# Altium PCB SKAR_chwytakfile.PcbDoc
Units mil, origin at the board's own origin, x right, y up, seen from the top; angles counter-clockwise.
Board outline 6000 x 4000 mil, 2 copper layers (Top Layer, Bottom Layer); 24 components, 27 nets, 127 pads, 20 vias.
Unrouted connection lines stored in the file: 3.
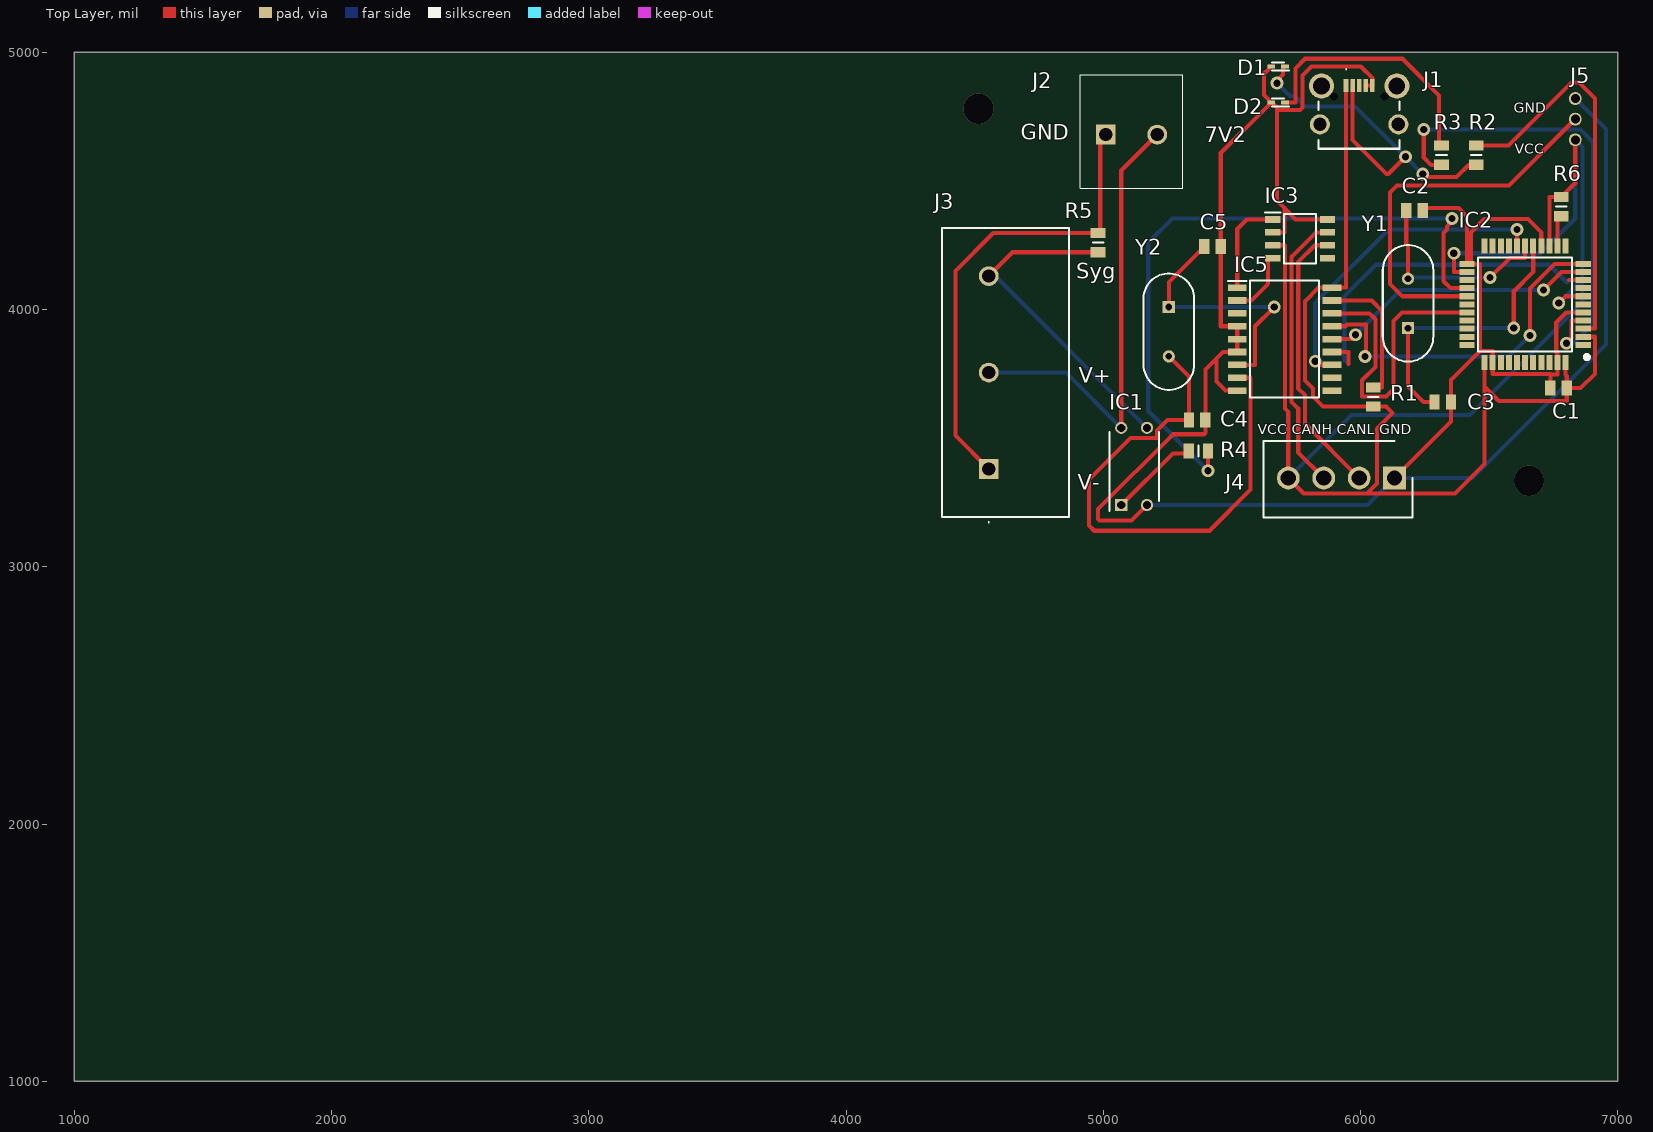
[diagram p0: Top Layer view]
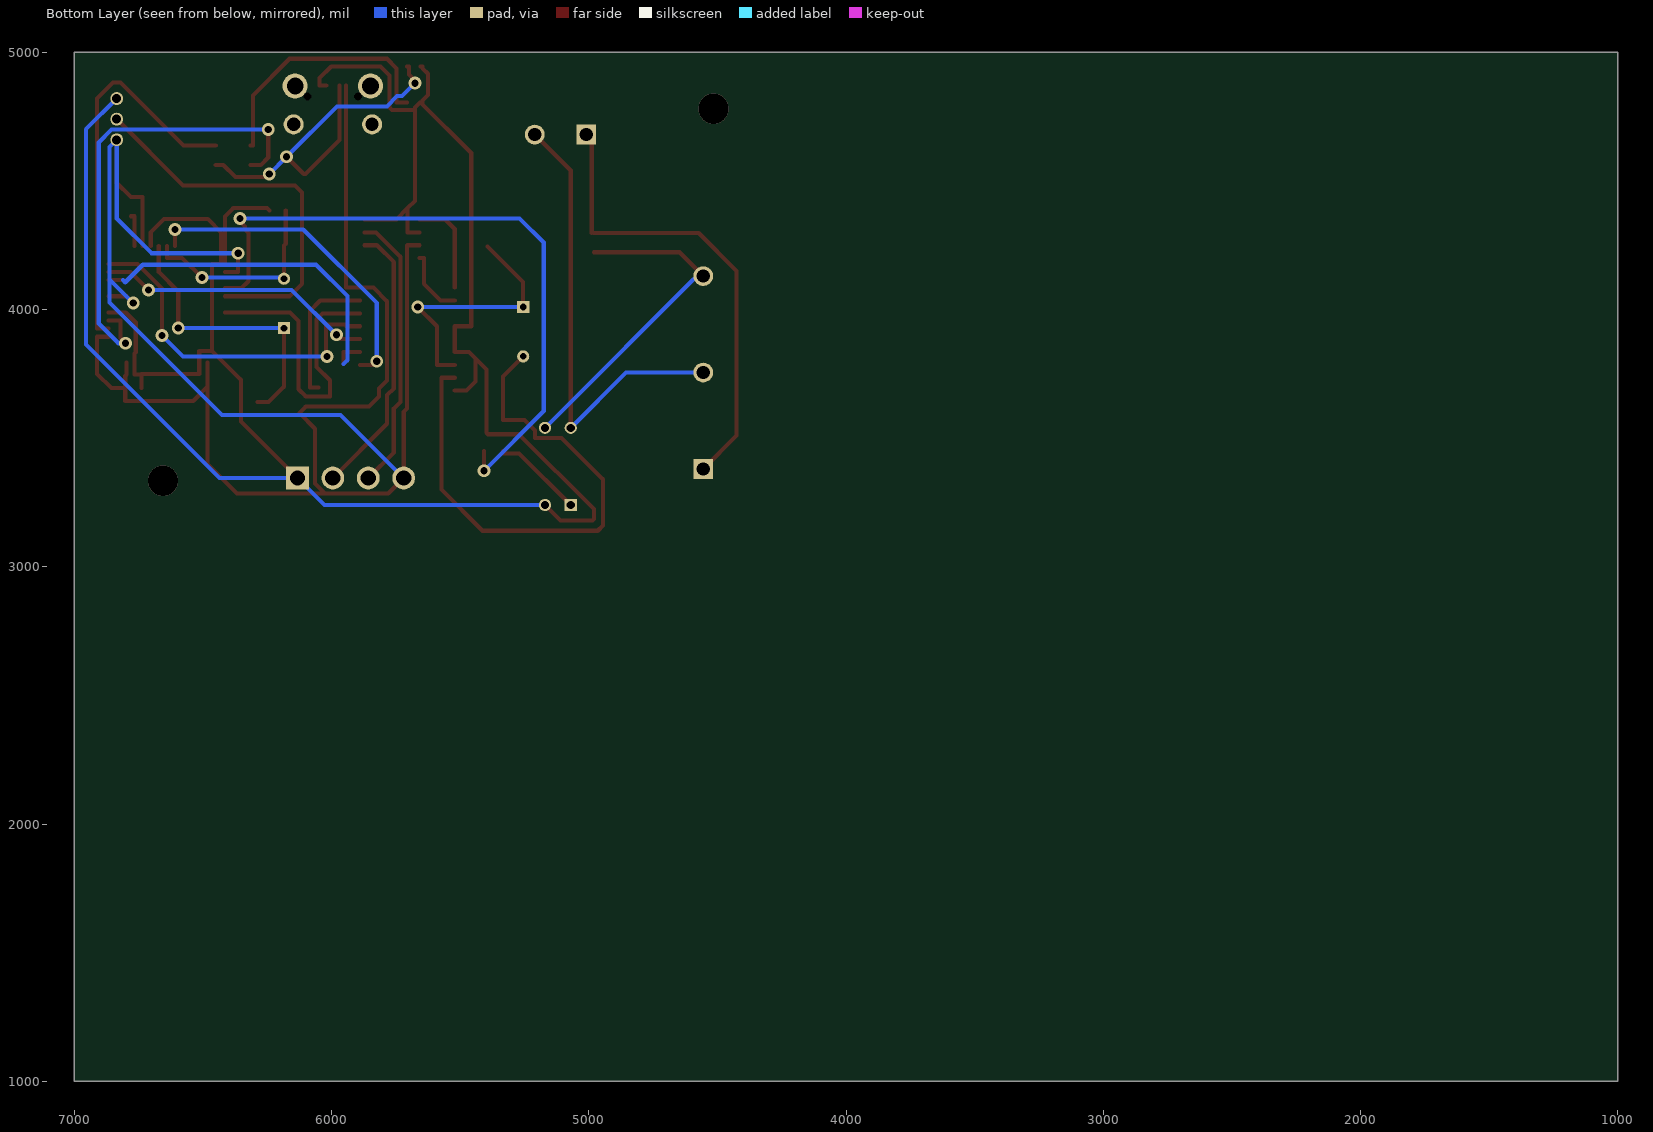
[diagram p1: Bottom Layer view, seen from below]
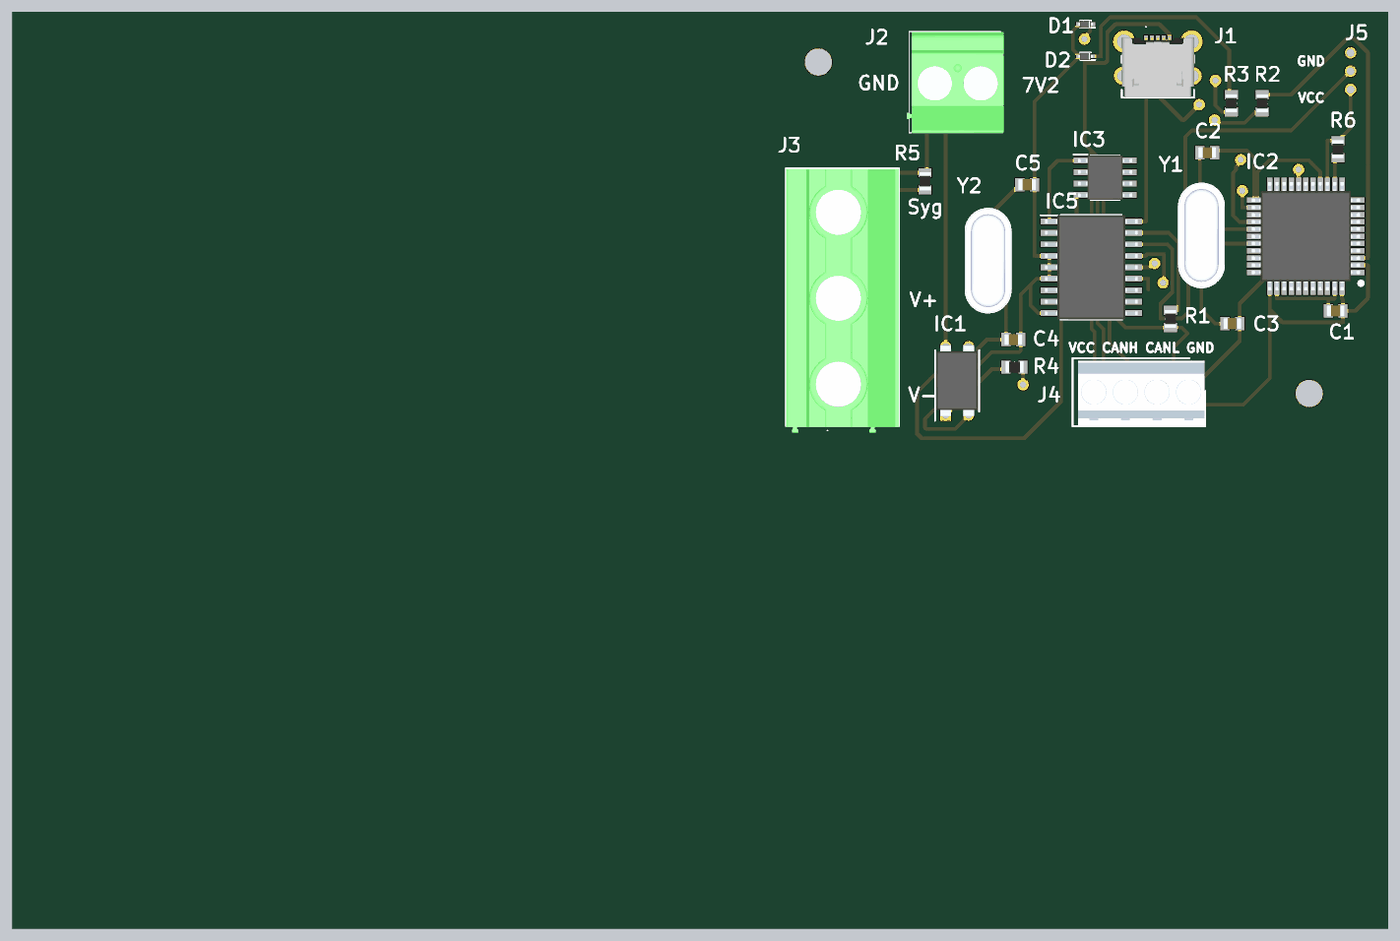
[diagram p2: 3D render of the assembled board from above, using the file's embedded part models]

## Layer stack, top to bottom
Top Solder: solder mask 0.4, Solder Resist, Dk 3.5
Top Layer: signal copper 1.4
Dielectric 1: dielectric 12.6, FR-4, Dk 4.8
Bottom Layer: signal copper 1.4
Bottom Solder: solder mask 0.4, Solder Resist, Dk 3.5

## Board outline
1000,1000 7000,1000 7000,5000 1000,5000

## Design rules (kind name [scope] priority, off if disabled: settings)
Clearance [All] p1: gap=10 ignorepadtopadclearanceinfootprint=TRUE except(16: Arc-Arc Arc-Track Track-Track)
PolygonConnect [All] p1: connectstyle=Relief reliefconductorwidth=10 reliefentries=4 polygonreliefangle="90 Angle" airgapwidth=10
RoomDefinition Sheet1 [InComponentClass('Sheet1')] p1: confinementstyle=ConfineOut formatcopy=TRUE lockcomponents=FALSE outline 7285,2995 14100,2995 14100,4715 7285,4715
RoutingVias [All] p1: holewidth=28 width=50 viastyle="Through Hole" minholewidth=28 minwidth=50 maxholewidth=28 maxwidth=50
SolderMaskExpansion [All] p1: expansion=4 istentingtop=FALSE
Width [All] p1: maxlimit=10 minlimit=10 preferedwidth=10
30 further rules are at their usual default settings.

## Components (designator, comment, footprint, x,y, rotation, side; value= is the part's Value field where it differs from the comment)
C1 "100nF" CAPC2012X94N 6770,3695 r180 top
C2 "100nF" CAPC2012X94N 6210,4385 r180 top
C3 "100nF" CAPC2012X94N 6320,3640 r180 top
C4 "100nF" CAPC2012X94N 5365,3570 r180 top
C5 "100nF" CAPC2012X94N 5425,4245 r180 top
D1 "EDZVT2R3.9B" SODFL1608X70N 5680,4945 r180 top
D2 "EDZVT2R3.9B" SODFL1608X70N 5680,4805 r180 top
IC1 "PC817X2NSZ0F" DIP762W60P254L458H400Q4N 5120,3390 r90 top
IC2 "ATMEGA32U4-AU" QFP80P1200X1200X120-44N 6640,4020 r180 top
IC3 "TJA1050T" SOIC127P600X175-8N 5765,4275 r0 top
IC5 "MCP2515-E_SO" SOIC127P1030X265-18N 5705,3885 r0 top
J1 "629105150521" 629105150521 5995,4755 r0 top
J2 "1711725" 1711725 5010,4680 r0 top
J3 "1714984" 1714984 4555,3380.2 r90 top
J4 "1546551-4" SHDR4W91P0X350_1X4_1400X730X875P 6132.8,3345 r180 top
J5 "Termometr" PCBComponent_1 6835,4660 r0 top
R1 "10K" RESC2012X65N 6050,3660 r90 top
R2 "68R" RESC2012X65N 6450,4600 r90 top
R3 "68R" RESC2012X65N 6315,4600 r270 top
R4 "1K" RESC2012X65N 5370,3450 r180 top
R5 "1K" RESC2012X65N 4980,4260 r90 top
R6 "10K" RESC2012X65N 6780,4400 r90 top
Y1 "ABL-12.000MHZ-B2" ABL 6185,3927.87 r90 top
Y2 "ABL-12.000MHZ-B2" ABL 5255,4010 r270 top

## Footprints (in the part's own frame and the unit in brackets; to place one, negate y for a bottom-side part, rotate by r counter-clockwise, add the part's x,y. Pads: shape width x height; smd on the part's side, far side on the other; paste and mask are expansions set on the pad)
1711725 [mm]
  rect 1.95x1.95 hole 1.3: 1(0,0)
  round 1.95 hole 1.3: 2(5.08,0)
  silkscreen extent -2.54,-5.3 7.62,5.9, body extent -2.79,-5.33 7.94,5.87, height 18.29
1714984 [mm]
  rect 1.95x1.95 hole 1.3: 1(0,0)
  round 1.95 hole 1.3: 2(9.52,0) 3(19.04,0)
  silkscreen extent -5.3,-7.9 23.8,4.6, body extent -5.46,-7.9 23.67,4.6, height 22
629105150521 [mm]
  rect 0.45x1.3 smd: 1(-1.3,2.95) 2(-0.65,2.95) 3(0,2.95) 4(0.65,2.95) 5(1.3,2.95)
  round 2.46 hole 1.64: MH1(-3.725,2.9) MH2(3.725,2.9)
  round 1.98 hole 1.32: MH3(-3.875,-0.9) MH4(3.875,-0.9)
  round 0.4 hole 0.8 unplated: MH5(-2.5,1.85) MH6(2.5,1.85)
  silkscreen extent -4,-3.3 4,4.6, body extent -4,-3.28 4,3.32, height 2.67
ABL [mm]
  rect 1.205x1.205 hole 0.657: 1(0,0)
  round 1.205 hole 0.657: 2(4.88,0)
  silkscreen extent -3.31,-2.5 8.19,2.5, body extent -3.31,-2.5 8.19,2.5, height 3.5
CAPC2012X94N [mm]
  rect 1.02x1.47 smd: 1(-0.81,0) 2(0.81,0)
  body extent -1,-0.63 1,0.63, height 0.94
DIP762W60P254L458H400Q4N [mm]
  rect 1.2x1.2 hole 0.8: 1(-3.81,1.27)
  round 1.2 hole 0.8: 2(-3.81,-1.27) 3(3.81,-1.27) 4(3.81,1.27)
  silkscreen extent -4.41,-2.44 3.4,2.44, body extent -3.96,-2.29 3.96,2.29, height 4
PCBComponent_1 [mil]
  round 50 hole 35: 1(0,160) 2(0,80) 3(0,0)
QFP80P1200X1200X120-44N [mm]
  rect 1.5x0.6 smd: 1(-5.75,4) 2(-5.75,3.2) 3(-5.75,2.4) 4(-5.75,1.6) 5(-5.75,0.8) 6(-5.75,0) 7(-5.75,-0.8) 8(-5.75,-1.6) 9(-5.75,-2.4) 10(-5.75,-3.2) 11(-5.75,-4) 23(5.75,-4) 24(5.75,-3.2) 25(5.75,-2.4) 26(5.75,-1.6) 27(5.75,-0.8) 28(5.75,0) 29(5.75,0.8) 30(5.75,1.6) 31(5.75,2.4) 32(5.75,3.2) 33(5.75,4)
  rect 0.6x1.5 smd: 12(-4,-5.75) 13(-3.2,-5.75) 14(-2.4,-5.75) 15(-1.6,-5.75) 16(-0.8,-5.75) 17(0,-5.75) 18(0.8,-5.75) 19(1.6,-5.75) 20(2.4,-5.75) 21(3.2,-5.75) 22(4,-5.75) 34(4,5.75) 35(3.2,5.75) 36(2.4,5.75) 37(1.6,5.75) 38(0.8,5.75) 39(0,5.75) 40(-0.8,5.75) 41(-1.6,5.75) 42(-2.4,5.75) 43(-3.2,5.75) 44(-4,5.75)
  silkscreen extent -6.3,-4.65 4.65,5.4, body extent -6,-6 6,6, height 1.2
RESC2012X65N [mm]
  rect 1x1.45 smd: 1(-0.95,0) 2(0.95,0)
  silkscreen extent 0,-0.53 0,0.53, body extent -1,-0.63 1,0.63, height 0.65
SHDR4W91P0X350_1X4_1400X730X875P [mm]
  rect 2.25x2.25 hole 1.5: 1(0,0)
  round 2.25 hole 1.5: 2(3.5,0) 3(7,0) 4(10.5,0)
  silkscreen extent -1.75,-3.65 12.95,3.9, body extent -1.66,-3.35 12.34,3.95, height 8.5
SODFL1608X70N [mm]
  rect 0.77x0.42 smd: 1(-0.675,0) 2(0.675,0)
  silkscreen extent -1.06,-0.4 0.6,0.4, body extent -0.8,-0.4 0.8,0.4, height 0.7
SOIC127P600X175-8N [mm]
  rect 1.525x0.65 smd: 1(-2.712,1.905) 2(-2.712,0.635) 3(-2.712,-0.635) 4(-2.712,-1.905) 5(2.712,-1.905) 6(2.712,-0.635) 7(2.712,0.635) 8(2.712,1.905)
  silkscreen extent -3.47,-2.45 1.6,2.58, body extent -3,-2.45 3,2.45, height 1.75
SOIC127P1030X265-18N [mm]
  rect 1.85x0.65 smd: 1(-4.675,5.08) 2(-4.675,3.81) 3(-4.675,2.54) 4(-4.675,1.27) 5(-4.675,0) 6(-4.675,-1.27) 7(-4.675,-2.54) 8(-4.675,-3.81) 9(-4.675,-5.08) 10(4.675,-5.08) 11(4.675,-3.81) 12(4.675,-2.54) 13(4.675,-1.27) 14(4.675,0) 15(4.675,1.27) 16(4.675,2.54) 17(4.675,3.81) 18(4.675,5.08)
  silkscreen extent -5.6,-5.77 3.4,5.77, body extent -5.15,-5.77 5.15,5.77, height 2.65

## Part data
C1 C2 C3 C4 C5: library part 08055A150JAT2A, "Capacitor", Manufacturer_Name=AVX, Mouser Part Number=581-08055A150J, Arrow Part Number=08055A150JAT2A, Arrow Price/Stock=https://www.arrow.com/en/products/08055a150jat2a/avx?region=nac, Datasheet Link=https://componentsearchengine.com/Datasheets/1/06031A100FAT2A.pdf, Height=0.94mm, Manufacturer_Part_Number=08055A150JAT2A, Mouser Price/Stock=https://www.mouser.co.uk/ProductDetail/AVX/08055A150JAT2A?qs=pZVDklL%2Fs8hiEua37sqbaA%3D%3D
D1 D2: "Zener Diode", Manufacturer_Name="ROHM Semiconductor", Mouser Part Number=755-EDZVT2R3.9B, Datasheet Link=https://datasheet.datasheetarchive.com/originals/distributors/Datasheets_SAMA/4f21d5300cb411da288c500765791f77.pdf, Height=0.7mm, Manufacturer_Part_Number=EDZVT2R3.9B, Mouser Price/Stock=https://www.mouser.co.uk/ProductDetail/ROHM-Semiconductor/EDZVT2R3.9B?qs=QcFhgjUTvvp7RoPbadtb3A%3D%3D
IC1: "Integrated Circuit", Manufacturer_Name="Sharp Microelectronics", Mouser Part Number=N/A, Datasheet Link=https://datasheet.datasheetarchive.com/originals/distributors/Datasheets_SAMA/458e45842a103a05998fcebbd6f7366e.pdf, Height=4mm, Manufacturer_Part_Number=PC817X2NSZ0F, Mouser Price/Stock=https://www.mouser.co.uk/ProductDetail/Sharp-Microelectronics/PC817X2NSZ0F?qs=6kT3pPPHxnU7uYWM8Yy85A%3D%3D
IC2: "Integrated Circuit", Manufacturer_Name=Microchip, Mouser Part Number=556-ATMEGA32U4-AU, Arrow Part Number=ATMEGA32U4-AU, Arrow Price/Stock=https://www.arrow.com/en/products/atmega32u4-au/microchip-technology?region=nac, Datasheet Link=http://www.atmel.com/images/atmel-7766-8-bit-avr-atmega16u4-32u4_summary.pdf, Height=1.2mm, Manufacturer_Part_Number=ATMEGA32U4-AU, Mouser Price/Stock=https://www.mouser.co.uk/ProductDetail/Microchip-Technology-Atmel/ATMEGA32U4-AU?qs=SSucg2PyLi7mKWjHIsNJ3w%3D%3D
IC3: "Integrated Circuit", Manufacturer_Name=NXP, Mouser Part Number=N/A, Datasheet Link=https://datasheet.datasheetarchive.com/originals/distributors/Datasheets-NXP/DSANXP010005907.pdf, Height=1.75mm, Manufacturer_Part_Number=TJA1050T, Mouser Price/Stock=https://www.mouser.co.uk/ProductDetail/NXP-Semiconductors/TJA1050T?qs=WhRErS6oET%252B5mtiFrt9ZMQ%3D%3D
IC5: "Integrated Circuit", Arrow Part Number=MCP2515-E/SO, Manufacturer_Name=Microchip, Mouser Part Number=579-MCP2515-E/SO, Arrow Price/Stock=https://www.arrow.com/en/products/mcp2515-eso/microchip-technology?region=nac, Datasheet Link=https://datasheet.datasheetarchive.com/originals/distributors/Datasheets-34/DSA-675135.pdf, Height=2.65mm, Manufacturer_Part_Number=MCP2515-E/SO, Mouser Price/Stock=https://www.mouser.co.uk/ProductDetail/Microchip-Technology-Atmel/MCP2515-E-SO?qs=y1t9dHv1DsLUSXaU9a01fg%3D%3D
J1: "Connector", Manufacturer_Name="Wurth Elektronik", Mouser Part Number=710-629105150521, Datasheet Link=https://www.we-online.com/components/products/datasheet/629105150521.pdf, Height=2.86mm, Manufacturer_Part_Number=629105150521, Mouser Price/Stock=https://www.mouser.co.uk/ProductDetail/Wurth-Elektronik/629105150521?qs=a9WhcLg8qCzXiH7kZP8GRQ%3D%3D
J2: "Connector", Manufacturer_Name="Phoenix Contact", Mouser Part Number=651-1711725, Arrow Part Number=1711725, Arrow Price/Stock=https://www.arrow.com/en/products/1711725/phoenix-contact?region=nac, Datasheet Link=http://www.phoenixcontact.net/product/1711725, Height=18.2mm, Manufacturer_Part_Number=1711725, Mouser Price/Stock=https://www.mouser.co.uk/ProductDetail/Phoenix-Contact/1711725?qs=F79NelsxgYFLEb9U5DotcA%3D%3D
J3: "Connector", Manufacturer_Name="Phoenix Contact", Mouser Part Number=651-1714984, Arrow Part Number=1714984, Arrow Price/Stock=https://www.arrow.com/en/products/1714984/phoenix-contact?region=nac, Datasheet Link=https://www.phoenixcontact.com/online/portal/us/?uri=pxc-oc-itemdetail:pid=1714984&library=usen&pcck=P-11-01-05&tab=1&selectedCategory=ALL, Height=21.7mm, Manufacturer_Part_Number=1714984, Mouser Price/Stock=https://www.mouser.co.uk/ProductDetail/Phoenix-Contact/1714984?qs=cyzODkzcbwBLTTPxtXl6gQ%3D%3D
J4: "Connector", Manufacturer_Name="TE Connectivity", Mouser Part Number=571-1546551-4, Arrow Part Number=1546551-4, Arrow Price/Stock=https://www.arrow.com/en/products/1546551-4/te-connectivity?region=nac, Datasheet Link=https://www.te.com/commerce/DocumentDelivery/DDEController?Action=showdoc&DocId=Customer+Drawing%7F1546551%7FB%7Fpdf%7FEnglish%7FENG_CD_1546551_B.pdf%7F1546551-4, Height=8.75mm, Manufacturer_Part_Number=1546551-4, Mouser Price/Stock=https://www.mouser.co.uk/ProductDetail/TE-Connectivity/1546551-4?qs=m%2FhmcwQ75LnAjOUb0MU8sQ%3D%3D
J5: library part 3goldpin
R1 R2 R3 R4 R5 R6: library part CPF0805B100RE1, "Resistor", Manufacturer_Name="TE Connectivity", Mouser Part Number=279-CPF0805B100RE1, Arrow Part Number=CPF0805B100RE1, Arrow Price/Stock=https://www.arrow.com/en/products/cpf0805b100re1/te-connectivity?region=nac, Datasheet Link=http://docs-europe.electrocomponents.com/webdocs/13d1/0900766b813d116f.pdf, Height=0.65mm, Manufacturer_Part_Number=CPF0805B100RE1, Mouser Price/Stock=https://www.mouser.co.uk/ProductDetail/TE-Connectivity-Holsworthy/CPF0805B100RE1?qs=9ylKvqdyudkCWLPT1QvLZQ%3D%3D
Y1 Y2: "Crystal or Oscillator", Manufacturer_Name=ABRACON, Mouser Part Number=815-ABL-12-B2, Arrow Part Number=ABL-12.000MHZ-B2, Arrow Price/Stock=https://www.arrow.com/en/products/abl-12.000mhz-b2/abracon?region=nac, Datasheet Link=https://abracon.com/Resonators/ABL.pdf, Manufacturer_Part_Number=ABL-12.000MHZ-B2, Mouser Price/Stock=https://www.mouser.co.uk/ProductDetail/ABRACON/ABL-12000MHZ-B2?qs=zLkLEWnxMJzcerUKP0J8Mw%3D%3D

## Via types
v1: diameter 50, hole 28, Top Layer to Bottom Layer, 18 vias
v2: diameter 118.11, hole 118.11, Top Layer to Bottom Layer, 2 vias

## Nets (pads, with @x,y where several pads share a name; then routed paths per layer and width w, separated by ;. In a path a pad name is that pad's centre, name@x,y a point inside that pad or via, vN(x,y) a via of type N, cw(c..) or ccw(c..) an arc to the next point about the centre after c; other vN are vias at no path point)
CAN_CS: IC2.29 IC5.16 | length 1198.2
  Top Layer w16: IC5.16 6035.15,3985 6058,3962.15 6058,3777 6006,3725 6006,3662 6100,3662 6128,3690 6128,3955 6161.5,3988.5 IC2.29
CAN_MISO: IC2.11 IC5.15 | length 1366.3
  Top Layer w16: IC5.15 5941,3935 5948.22,3942.22 6021,3942.22 6021,3820 v1(6018,3817) ; v1(6659,3899) 6659,4082 6754.48,4177.48 IC2.11
  Bottom Layer w16: v1(6018,3817) 6577,3817 v1(6659,3899)
CAN_MOSI: IC2.10 IC5.14 | length 1085.4
  Top Layer w16: IC5.14 5964,3885 v1(5981,3902) ; v1(6711.02,4076) 6781,4145.98 IC2.10
  Bottom Layer w16: v1(5981,3902) 6155,4076 v1(6711.02,4076)
CAN_SCK: IC2.9 IC5.13 | length 1391.8
  Top Layer w16: IC5.13 5953,3835 5953,3788 ; 6810.49,4114.49 IC2.9
  Bottom Layer w16: 5953,3788 5938,3803 5938,4052 6060.02,4174.02 6733.98,4174.02 6802,4106 6810.49,4114.49
GND: C1.2 C2.1 C3.1 C4.1 C5.1 D1.2 D2.2 IC1.2 IC2.5 IC2.15 IC2.23 IC2.35 IC2.43 IC3.2 IC3.8 IC5.4 IC5.5 IC5.6 IC5.9 J1.4 J1.5 J4.1 J5.1 | length 9717.5
  Top Layer w16: IC1.2 5110,3180 4985.86,3180 4980,3185.86 4980,3224 5271,3515 5391.03,3515 5396.89,3520.86 C4.1 5396.89,3766.89 5440,3810 ; IC5.9 5475,3685 5440,3720 5440,3810 ; D1.2 5646.54,4945 5646.27,4944.73 5646.27,4937.84 5625,4916.57 5625,4833.43 5646.27,4812.16 5646.27,4805.27 5646.54,4805 D2.2 ; IC3.2 5704,4300 5704,4394 ; IC3.8 5748,4350 5704,4394 ; J1.4 6020.59,4871 6046.18,4871 J1.5 6046.18,4900 6001.18,4945 5810,4945 5775,4910 5775,4785.37 5765.63,4776 5676,4776 ; J4.1 6351.89,3564.09 C3.1 6351.89,3726.89 6464,3839 ; C2.1 6250.89,4394 6381.89,4394 6414,4361.89 IC2.23@6414,4177.48 ; IC2.23 IC2.23@6414,4177.48 ; IC2.15 6702.99,4300 6650.99,4352 6481,4352 6429,4300 IC2.23@6429,4177.48 ; C1.2 6738.11,3748 ; IC2.5 6800,3988.5 6761,3949.5 6761,3833.98 6765.98,3829 IC2.43 6765.98,3748 6738.11,3748 ; 5440,3810 5465,3835 IC5.6 IC5.5 IC5.4 5456.89,3935 C5.1 5456.89,4608.46 D2.2 ; D2.2 5656,4805 5676,4785 5676,4776 ; 5676,4776 5676,4422 5704,4394 ; IC2.23@6414,4177.48 IC2.23@6429,4177.48 ; IC2.23@6429,4177.48 6464,4177.48 6464,3839 ; 6464,3839 6514.02,3839 IC2.35 6514.02,3749 6738.11,3749 6738.11,3748
  Bottom Layer w16: IC1.2 6027.8,3240 J4.1 6435,3345 6954,3864 6954,4701 J5.1
INT: IC2.18 IC5.12 | length 1264.4
  Top Layer w16: v1(5824,3799) 5838,3785 IC5.12 ; IC2.18 v1(6608.5,4311)
  Bottom Layer w16: v1(5824,3799) 5824,4025 6110,4311 v1(6608.5,4311)
NetD1_1: D1.1 J1.2 R2.1 | length 1528.2
  Top Layer w16: v1(5675,4880) 5675,4889.2 5699.42,4913.62 5699.42,4944.73 5699.68,4945 D1.1 ; J1.2 5969.41,4659 6101.41,4527 6108,4527 v1(6175,4594) ; v1(6242,4527) 6251.2,4527 6263.2,4515 6373.4,4515 6421,4562.6 R2.1
  Bottom Layer w16: v1(5675,4880) 5725.31,4829.69 5745.31,4829.69 5785,4790 5979,4790 v1(6175,4594) v1(6242,4527)
NetD2_1: D2.1 J1.3 R3.1 | length 1010
  Top Layer w16: D2.1 5747,4805 5747,4937 5785,4975 6163,4975 6306,4832 6306,4637.4 R3.1
NetIC1_1: IC1.1 R4.2 | length 354.9
  Top Layer w16: IC1.1 5271,3441 5332.6,3441 R4.2
NetIC1_3: IC1.3 J3.3 R5.1 | length 1322.7
  Top Layer w16: J3.3 4647.79,4222.6 R5.1
  Bottom Layer w16: J3.3 4566.63,4118.18 4591.82,4118.18 5124.11,3585.89 IC1.3
NetIC1_4: IC1.4 J2.2 J3.2 | length 1802
  Top Layer w16: IC1.4 5070,4540 J2.2
  Bottom Layer w16: J3.2 4855,3755 IC1.4
NetIC2_3: IC2.3 R2.2 | length 1527.7
  Top Layer w16: R2.2 6575.4,4637.4 6820,4882 6850,4882 6911,4821 6911,3925.51 IC2.3
NetIC2_4: IC2.4 R3.2 | length 1851.3
  Top Layer w16: v1(6246,4700) 6246,4591.6 6275,4562.6 R3.2 ; v1(6801,3869) 6821,3889 6821,3957.01 IC2.4
  Bottom Layer w16: v1(6246,4700) 6855,4700 6905,4650 6905,3945 6829,3869 v1(6801,3869)
NetIC2_13: IC2.13 R6.1 | length 130.2
  Top Layer w16: IC2.13 6765.98,4362.6 R6.1
NetIC2_26: IC2.26 R4.1 | length 2639.7
  Top Layer w16: v1(5407.4,3373) R4.1 ; v1(6356,4354) 6356,4343.18 6335.68,4322.86 6335.68,4310.68 6323,4298 6323,4109.99 6350,4082.99 IC2.26
  Bottom Layer w16: v1(5407.4,3373) 5175,3605.4 5175,4260 5269,4354 v1(6356,4354)
NetIC2_27: IC2.27 J5.2 | length 1511.8
  Top Layer w16: IC2.27 6163.5,4051.5 6115,4100 6115,4455 6142,4482 6577,4482 J5.2
NetIC3_1: IC3.1 IC5.1 | length 380.6
  Top Layer w16: IC5.1 5521,4085 5521,4313 5558,4350 IC3.1
NetIC3_4: IC3.4 IC5.2 | length 264.2
  Top Layer w16: IC5.2 5576,4035 5641,4100 5641,4200 IC3.4
NetIC3_6: IC3.6 J4.2 | length 1078.3
  Top Layer w16: IC3.6 5824,4250 5758,4184 5758,3693 5784,3667 5784,3556 J4.2
NetIC3_7: IC3.7 J4.3 | length 1091
  Top Layer w16: J4.3 5758,3444.2 5758,3615 5732,3641 5732,4205 5827,4300 IC3.7
NetIC5_17: IC5.17 R1.2 | length 543
  Top Layer w16: IC5.17 6043.84,4035 6084,3994.84 6084,3697.4 R1.2
NetJ2_1: J2.1 J3.1 R5.2 | length 1831.3
  Top Layer w16: J3.1 4425,3510.2 4425,4150 4572.4,4297.4 R5.2 ; R5.2@4988.31,4297.4 4988.31,4658.31 J2.1
OSC1: C4.2 IC5.8 Y2.2 | length 2149.6
  Top Layer w16: Y2.2 5333.11,3739.76 C4.2 5250,3570 5209,3529 5209,3501 5106,3501 4945,3340 4945,3160 4965,3140 5413,3140 5573,3300 5573,3735 IC5.8
OSC2: C5.2 IC5.7 Y2.1 | length 1027.3
  Top Layer w16: Y2.1 5255,4106.89 C5.2 ; IC5.7 5590,3785 5590,3935 v1(5665,4010)
  Bottom Layer w16: Y2.1 v1(5665,4010)
VCC: C1.1 IC2.2 IC2.7 IC2.14 IC2.24 IC2.34 IC2.44 IC3.3 IC5.18 J1.1 J4.4 J5.3 R1.1 R6.2 | length 8788.4
  Top Layer w16: IC3.3 5705,4250 5706,4249 5706,3615 5719.41,3601.59 J4.4 5779.41,3285 6025,3285 ; J1.1 5943.82,4085 IC5.18 5837,4085 5784,4032 5784,3724.39 5815.39,3693 5815.39,3661.61 5854.4,3622.6 R1.1 6100,3622.6 6125,3597.6 6064,3536.6 6064,3324 6025,3285 ; v1(6363,4219) 6363,4145.98 IC2.24 ; IC2.34 6482.52,3700 ; IC2.14 6734.49,4437.4 R6.2 6835,4492.4 J5.3 ; v1(6771,4025) 6797.5,4051.5 IC2.7 ; IC2.44 6797.48,3746.41 6801.89,3742 C1.1 ; IC2.2 6911,3894.02 6911,3750 6856,3695 C1.1 ; 6025,3285 6367.52,3285 6482.52,3400 6482.52,3700 ; 6482.52,3700 6537.63,3644.89 6801.89,3644.89 C1.1
  Bottom Layer w16: J4.4 5964.41,3590 6426.23,3590 6863,4026.77 6863,4117 ; v1(6363,4219) 6700,4219 6835,4354 J5.3 6863,4632 6863,4117 ; v1(6771,4025) 6863,4117
XTAL1: C2.2 IC2.17 Y1.2 | length 801.8
  Top Layer w16: C2.2 6178.11,4255.89 6185,4249 Y1.2 ; v1(6504,4124) 6581,4201 6640,4201 IC2.17
  Bottom Layer w16: Y1.2 6189,4124 v1(6504,4124)
XTAL2: C3.2 IC2.16 Y1.1 | length 1116.6
  Top Layer w16: Y1.1 6185,3700 6245,3640 C3.2 ; v1(6596,3927.87) 6596,4071 6671.5,4146.5 IC2.16
  Bottom Layer w16: Y1.1 v1(6596,3927.87)
pads on no net: IC2.1 IC2.6 IC2.8 IC2.12 IC2.19 IC2.20 IC2.21 IC2.22 IC2.25 IC2.28 IC2.30 IC2.31 IC2.32 IC2.33 IC2.36 IC2.37 IC2.38 IC2.39 IC2.40 IC2.41 IC2.42 IC3.5 IC5.3 IC5.10 IC5.11 J1.MH1 J1.MH2 J1.MH3 J1.MH4 J1.MH5 J1.MH6
copper on no net:
  other v2: 6655,3335 4515,4780

## Silkscreen, mask and mechanical layers (free items; w line width, h text height)
Top Overlay:
  text "GND" at 6595,4765 h40
  text "GND" at 4680,4660 h60
  text "7V2" at 5395,4650 h60
  text "VCC" at 6600,4605 h40
  text "Syg" at 4895,4119.99 h60
  text "V+" at 4905,3715 h60
  text "VCC CANH CANL GND" at 5600,3515 h40
  text "V-" at 4900,3300 h60